# EAGLE board UGS+PSU (EAGLE 6.3)
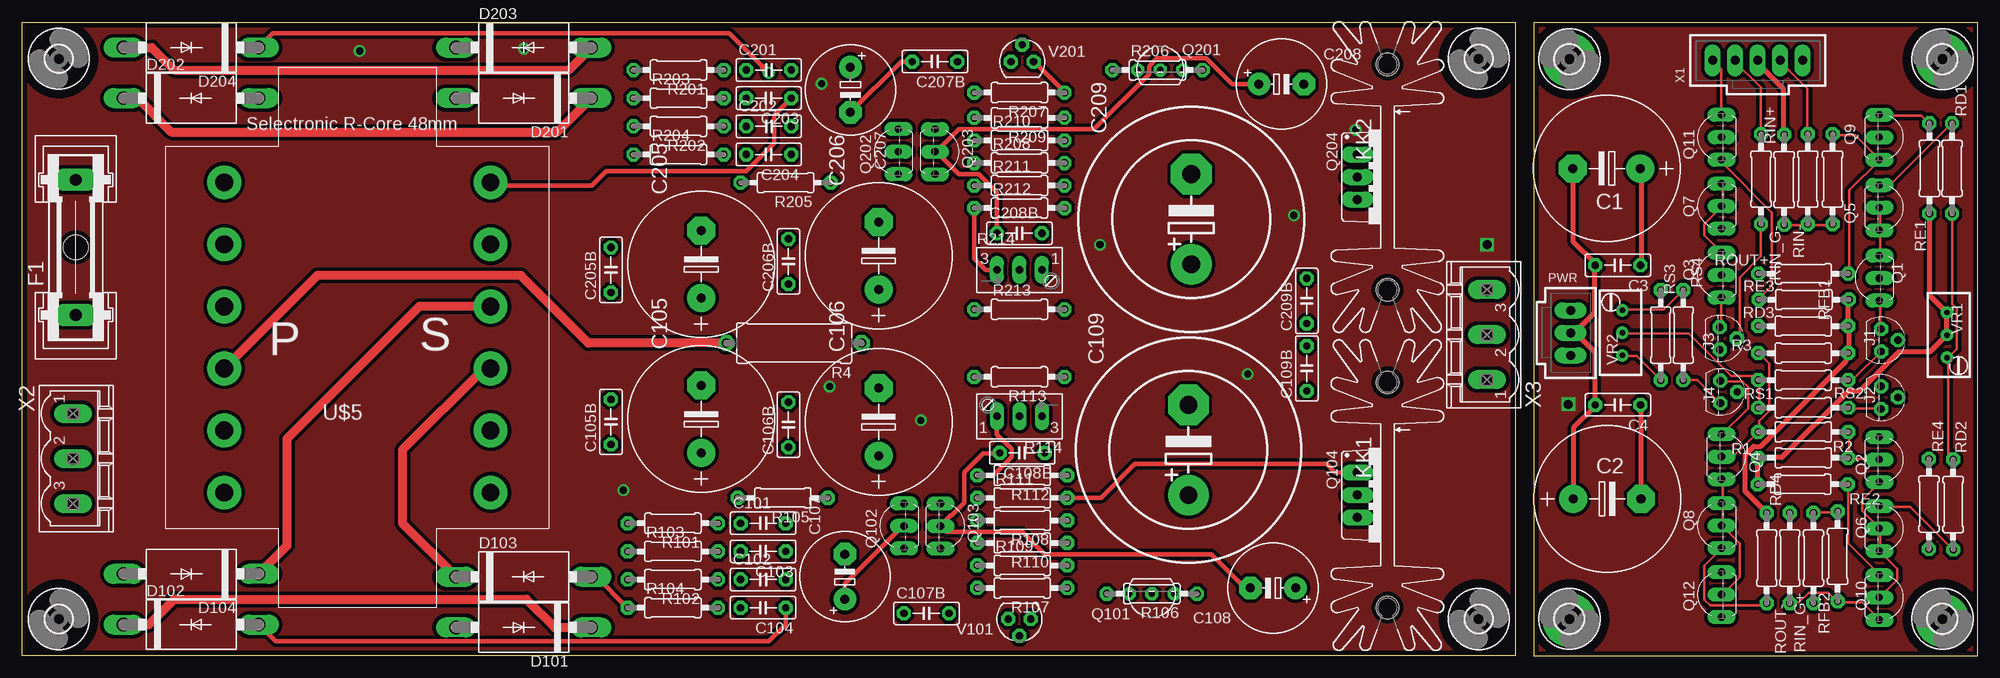
[diagram p0: board, top side]
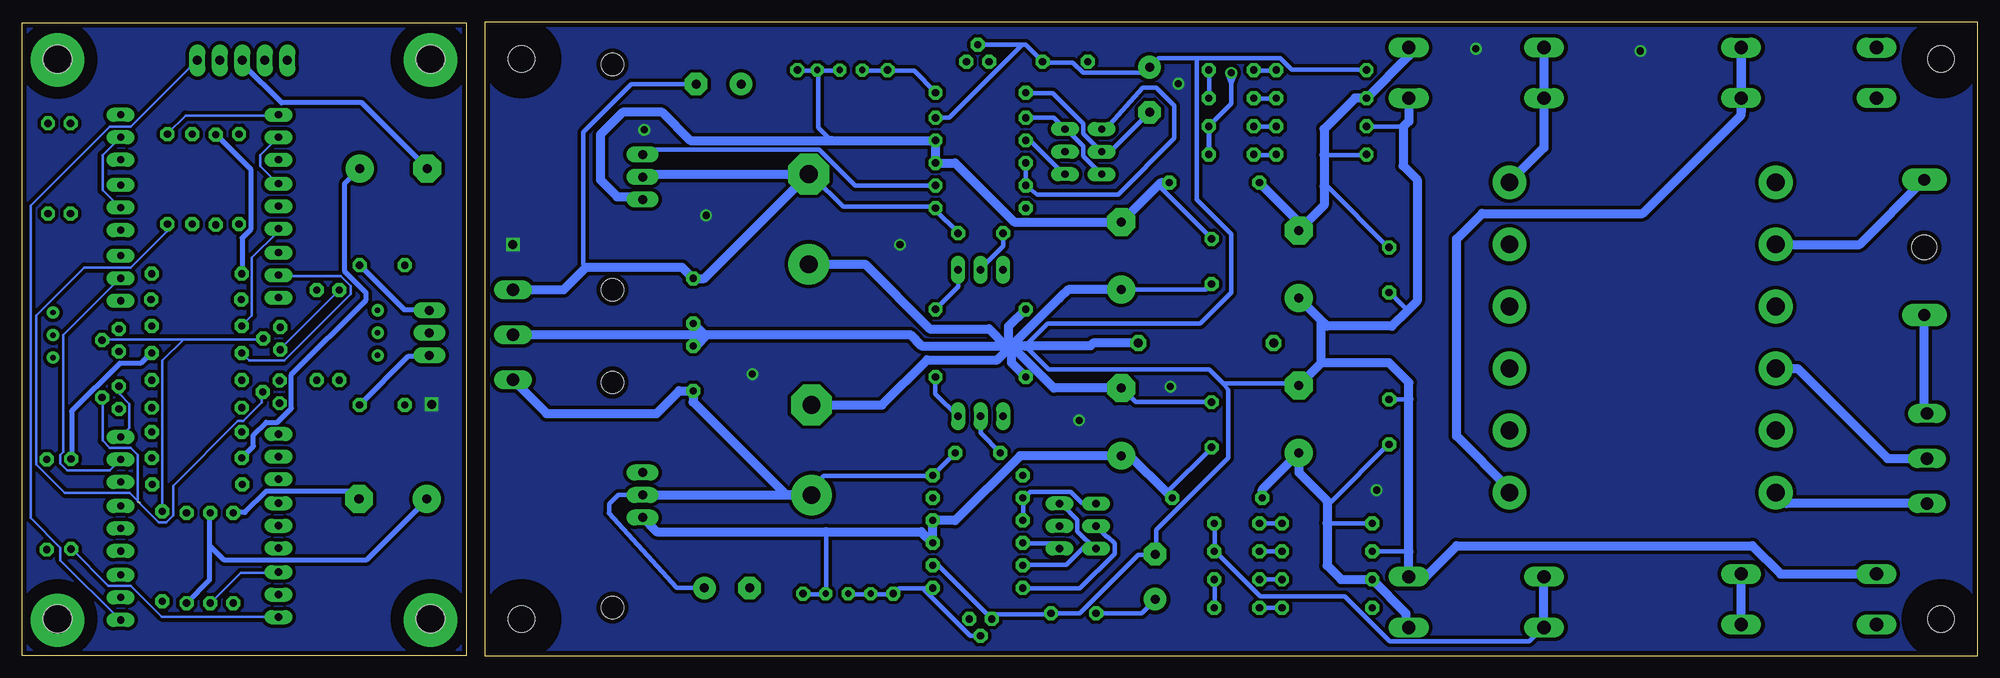
[diagram p1: board, bottom side, seen from below]

Size 220.41 x 71.47 mm. Coordinates in mm from the lower left corner, seen from the top.
Outline: 170.38,71.42 170.38,0 220.41,0 220.41,71.42 170.38,71.42
Outline: 168.28,0.03 0,0.03 0,71.47 168.28,71.47 168.28,0.03
Copper layers (1*16): Top 0.035mm / dielectric 1.5mm / Bottom 0.035mm
Design rules "gael design rules": minimum track width 0.2mm, minimum drill 0.4mm, track to track 8mil, track to pad 8mil, pad to pad 8mil, via to via 8mil, smd to smd 8mil, copper to edge 20mil, drill to drill 8mil, minimum pad ring 15mil, minimum via ring 10mil, stop-mask expansion 4mil, vias tented up to drill 0mil, thermal gap 10mil
Net classes: 0 default: width 0.203 mm, clearance 0.203 mm; 1 Mains: width 1.016 mm, clearance 2.5 mm; 2 power: width 0.508 mm, clearance 0.203 mm

## Footprints (pad centres in the part's own frame; a part is rotated, then mirrored left to right if it is on the bottom)
E7,5-16 = drill 1.016 pad 3.15: + -3.81,0 | drill 1.016 pad 3.15 octagon: - 3.81,0
C050-025X075 = drill 0.813 octagon: 1 -2.54,0; 2 2.54,0
E5-10,5 = drill 1.016 pad 2.54: + -2.54,0 | drill 1.016 pad 2.54 octagon: - 2.54,0
EB25D = drill 2.007 pad 4.597: + -5.08,0 | drill 2.007 pad 4.597 octagon: - 5.08,0
DO201-15 = drill 1.499 long: A 7.62,0; C -7.62,0
UGS = drill 3 pad 6: P$1 23.165,-12.497; P$2 23.19,29.54; P$3 -40.005,29.54; P$4 -40.005,-12.497
GSH15 = drill 1.321 pad 2.54 long: 1 -7.62,0; 2 7.62,0 | hole 2.794: 0,0
3,0 = hole 3: 0,0
TO92 = drill 0.813 octagon: 1 1.27,0; 2 0,1.905; 3 -1.27,0
SK104 = hole 2.54: -12.7,-0.762; 12.7,-0.762
70543-03 = drill 1.016 long: 1 -2.54,0; 2 0,0; 3 2.54,0
TO92-EBC = drill 0.813 long: B 0,-1.27; C 2.54,-1.27; E -2.54,-1.27
TO-92 = drill 0.7 octagon: 1 -2.54,0; 2 0,0; 3 2.54,0
TO220BV = drill 1.016 long: D 0,-2.54; G -2.54,-2.54; S 2.54,-2.54
0207/10 = drill 0.813 octagon: 1 -5.08,0; 2 5.08,0
P0613/15 = drill 1.016 octagon: 1 -7.62,0; 2 7.62,0
S64W = drill 0.813 long: A 2.54,1.27; E -2.54,1.27; S 0,1.27
3,2 = hole 3.2: 0,0
R-CORE48MM = drill 2 pad 3.81: P1 -15,-17.5; P2 -15,-10.5; P3 -15,-3.5; P4 -15,3.5; P5 -15,10.5; P6 -15,17.5; P7 15,17.5; P8 15,10.5; P9 15,3.5; P10 15,-3.5; P11 15,-10.5; P12 15,-17.5
SOT54E = drill 0.813 octagon: A1 -1.27,0; A2 1.27,0; C 0,1.905
RTRIMT93YA = drill 0.61: 1 0,-2.54; 2 0,0; 3 0,2.54
70543-05 = drill 1.016 long: 1 -5.08,0; 2 -2.54,0; 3 0,0; 4 2.54,0; 5 5.08,0
MSTBV3 = drill 1.397 long: 1 -5.08,0; 2 0,0; 3 5.08,0

## Placement (x,y rotation side)
C1  470µ  [E7,5-16]  178.57,54.97 180 top
C2  470µ  [E7,5-16]  178.64,17.7 0 top
C3  100nF  [C050-025X075]  179.84,44.05 180 top
C4  100nF  [C050-025X075]  179.84,28.3 180 top
C101  100n  [C050-025X075]  83.5,14.95 0 top
C102  100n  [C050-025X075]  83.5,8.6 0 top
C103  100n  [C050-025X075]  83.5,11.78 180 top
C104  100n  [C050-025X075]  83.5,5.43 180 top
C105  2200µ  [E7,5-16]  76.52,26.7 90 top
C105B  100n  [C050-025X075]  66.36,26.38 90 top
C106  1000µ  [E7,5-16]  96.52,26.38 90 top
C106B  100n  [C050-025X075]  86.36,26.07 90 top
C107  100µ  [E5-10,5]  92.71,8.92 90 top
C107B  100n  [C050-025X075]  101.92,4.79 0 top
C108  100µ  [E5-10,5]  140.97,7.65 180 top
C108B  100n  [C050-025X075]  112.71,22.89 180 top
C109  4700µ  [EB25D]  131.44,23.21 90 top
C109B  100n  [C050-025X075]  144.78,32.42 90 top
C201  100n  [C050-025X075]  84.14,66.07 0 top
C202  100n  [C050-025X075]  84.14,59.72 0 top
C203  100n  [C050-025X075]  84.14,62.9 180 top
C204  100n  [C050-025X075]  84.14,56.55 180 top
C205  2200µ  [E7,5-16]  76.52,44.16 90 top
C205B  100n  [C050-025X075]  66.36,43.53 90 top
C206  1000µ  [E7,5-16]  96.52,45.12 90 top
C206B  100n  [C050-025X075]  86.36,44.48 90 top
C207  100µ  [E5-10,5]  93.34,63.85 270 top
C207B  100n  [C050-025X075]  102.87,67.02 180 top
C208  100µ  [E5-10,5]  141.92,64.48 0 top
C208B  100n  [C050-025X075]  112.4,47.66 0 top
C209  4700µ  [EB25D]  131.76,49.24 90 top
C209B  100n  [C050-025X075]  144.78,40.04 90 top
D101  MUR220  [DO201-15]  56.52,3.21 180 top
D102  MUR220  [DO201-15]  19.05,3.52 0 top
D103  MUR220  [DO201-15]  56.52,8.92 0 top
D104  MUR220  [DO201-15]  19.05,9.24 180 top
D201  MUR220  [DO201-15]  56.52,62.9 180 top
D202  MUR220  [DO201-15]  19.05,62.9 0 top
D203  MUR220  [DO201-15]  56.52,68.61 0 top
D204  MUR220  [DO201-15]  19.05,68.61 180 top
E$1  [UGS]  186.88,27.2 270 top
F1  100mA  [GSH15]  6.03,46.07 90 top
H1  MOUNT-HOLE3.0  [3,0]  164.15,67.34 180 top
H2  MOUNT-HOLE3.0  [3,0]  4.13,4.16 180 top
H3  MOUNT-HOLE3.0  [3,0]  4.13,67.34 180 top
H4  MOUNT-HOLE3.0  [3,0]  164.15,4.16 180 top
J1  2SK170 J1  [TO92]  209.5,35.6 270 top
J2  2SK170 J2  [TO92]  209.5,29.13 270 top
J3  2SJ74 J3  [TO92]  191.34,35.79 270 top
J4  2SJ74 J4  [TO92]  191.4,29.76 270 top
KK1  SK104  [SK104]  154.62,18.13 270 top
KK2  SK104  [SK104]  154.62,54.01 270 top
PWR  PWR  [70543-03]  174.51,36.43 270 top
Q1  ZTX450  [TO92-EBC]  208.04,42.59 90 top
Q2  ZTX450  [TO92-EBC]  210.58,22.14 270 top
Q3  ZTX550  [TO92-EBC]  190.26,42.94 90 top
Q4  ZTX550  [TO92-EBC]  192.8,22.46 270 top
Q5  ZTX550  [TO92-EBC]  210.58,50.56 270 top
Q6  ZTX550  [TO92-EBC]  210.58,14.36 270 top
Q7  ZTX450  [TO92-EBC]  190.26,50.72 90 top
Q8  ZTX450  [TO92-EBC]  190.26,14.68 90 top
Q9  ZTX550  [TO92-EBC]  210.58,58.5 270 top
Q10  ZTX550  [TO92-EBC]  210.58,6.58 270 top
Q11  ZTX450  [TO92-EBC]  190.26,58.5 90 top
Q12  ZTX450  [TO92-EBC]  190.26,6.9 90 top
Q101  J113  [TO-92]  127.32,7.02 180 top
Q102  MPSA42  [TO92-EBC]  98.11,14.64 90 top
Q103  MPSA42  [TO92-EBC]  104.78,14.64 270 top
Q104  IRF9610  [TO220BV]  153.03,18.13 270 top
Q201  J113  [TO-92]  128.27,66.07 0 top
Q202  MPSA92  [TO92-EBC]  97.47,56.86 90 top
Q203  MPSA92  [TO92-EBC]  104.14,56.86 270 top
Q204  IRF610  [TO220BV]  153.03,54.01 270 top
R1  10k  [0207/10]  200.74,22.33 180 top
R2  15k  [0207/10]  200.74,25.25 0 top
R3  10k  [0207/10]  200.74,34.14 0 top
R4  10R/1W  [P0613/15]  87,35.27 180 top
R101  1.2R  [0207/10]  73.34,14.95 180 top
R102  1.2R  [0207/10]  73.34,8.6 180 top
R103  1.2R  [0207/10]  73.34,11.78 0 top
R104  1.2R  [0207/10]  73.34,5.43 0 top
R105  4.7R  [0207/10]  85.72,17.81 180 top
R106  10k  [0207/10]  127.32,7.02 180 top
R107  1k  [0207/10]  112.71,7.65 180 top
R108  10k  [0207/10]  112.71,15.27 180 top
R109  4,7K  [0207/10]  112.71,10.19 0 top
R110  10k  [0207/10]  112.71,12.73 180 top
R111  220R  [0207/10]  112.71,17.81 0 top
R112  22k  [0207/10]  112.71,20.35 180 top
R113  5,6k  [0207/10]  112.4,31.46 180 top
R114  1k  [S64W]  112.4,28.29 180 top
R201  1.2R  [0207/10]  73.98,66.07 180 top
R202  1.2R  [0207/10]  73.98,59.72 180 top
R203  1.2R  [0207/10]  73.98,62.9 0 top
R204  1.2R  [0207/10]  73.98,56.55 0 top
R205  4.7R  [0207/10]  86.04,53.37 180 top
R206  10k  [0207/10]  127.95,66.07 0 top
R207  1k  [0207/10]  112.4,63.53 180 top
R208  10k  [0207/10]  112.4,55.59 0 top
R209  4,7K  [0207/10]  112.4,60.67 180 top
R210  10k  [0207/10]  112.4,58.13 0 top
R211  220R  [0207/10]  112.4,53.05 0 top
R212  22k  [0207/10]  112.4,50.51 0 top
R213  5,6k  [0207/10]  112.4,39.08 0 top
R214  1k  [S64W]  112.4,42.26 0 top
RD1  1k47  [0207/10]  217.5,54.97 90 top
RD2  1k47  [0207/10]  217.63,17.06 270 top
RD3  1k5  [0207/10]  200.74,37.19 0 top
RD4  1k5  [0207/10]  196.61,11.03 90 top
RE1  750R  [0207/10]  214.96,54.97 270 top
RE2  750R  [0207/10]  200.67,19.35 0 top
RE3  750R  [0207/10]  200.8,40.18 0 top
RE4  750R  [0207/10]  214.9,17.12 90 top
RFB1  56k  [0207/10]  204.04,53.76 90 top
RFB2  56k  [0207/10]  204.61,11.22 90 top
RIN+  15k  [0207/10]  195.97,53.76 90 top
RIN-  15k  [0207/10]  201.24,53.76 270 top
RIN_G+  47k  [0207/10]  201.88,11.03 90 top
RIN_G-  47k  [0207/10]  198.58,53.7 270 top
ROUT+  1k  [0207/10]  200.74,43.1 0 top
ROUT-  1k  [0207/10]  199.21,11.03 270 top
RS1  47R rs1  [0207/10]  200.74,31.1 180 top
RS2  47R rs2  [0207/10]  200.74,27.98 180 top
RS3  22R rs3  [0207/10]  184.67,36.18 90 top
RS4  22R rs4  [0207/10]  187.21,36.18 270 top
U$1  [3,2]  216.42,67.29 270 top
U$2  [3,2]  216.42,4.17 270 top
U$3  [3,2]  174.38,4.17 270 top
U$4  [3,2]  174.38,67.29 270 top
U$5  R-CORE-SELECTRONIC-PCB  [R-CORE48MM]  37.78,35.91 0 top
V101  LM336-5  [SOT54E]  112.4,4.16 180 top
V201  LM336-5  [SOT54E]  112.71,67.02 0 top
VR1  20R  [RTRIMT93YA]  216.93,36.18 180 top
VR2  50R  [RTRIMT93YA]  180.35,36.43 0 top
X1  C-GRID-05-70543  [70543-05]  195.59,67.16 0 top
X2  220V  [MSTBV3]  5.72,22.26 270 top
X3  MSTBV3  [MSTBV3]  165.1,36.23 90 top

## Library data of the parts
C1-C4 C101-C105 C105B C106 C106B C107 C107B C108 C108B C109 C109B C201-C205 C205B C206 C206B C207 C207B C208 C208B C209 C209B R1-R4 R101-R113 R201-R213 RD1-RD4 RE1-RE4 RFB1 RFB2 RIN+ RIN- RIN_G+ RIN_G- ROUT+ ROUT- RS1-RS4 VR1 VR2 = rcl
D101-D104 D201-D204 V101 V201 = diode
E$1 U$5 = gael
F1 = fuse; MPN: 64900001039; OC_FARNELL: 1271673; OC_NEWARK: 02P0318
H1-H4 U$1-U$4 = holes
J1-J4 = transistor-fet
KK1 KK2 = heatsink
PWR X1 = con-molex; OC_FARNELL: unknown; OC_NEWARK: unknown
Q1-Q12 Q102 Q103 Q202 Q203 = transistor
Q101 Q201 = 00_steve
Q104 Q204 = transistor-power
R114 R214 = pot
X2 X3 = con-phoenix-508; MPN: MSTBV 2,5/3-GF-5.08; OC_FARNELL: 1792793; OC_NEWARK: 69R9846

## Nets
+24V [power]: C1.+ C3.1 PWR.1 R1.2 RE1.2 RE2.1 VR1.1 VR1.2
-24V [power]: C2.- C4.1 PWR.3 R3.2 RD3.2 RD4.2 RE3.2 RE4.2
GND [power]: C1.- C2.+ C3.2 C4.2 PWR.2 RIN_G+.1 RIN_G-.1 ROUT+.1 ROUT-.1 X1.3
GND1 [power]: C105.- C105B.2 C106.- C106B.2 C107.- C107B.2 C109.- C109B.2 C205.+ C205B.1 C206.+ C206B.1 C207.+ C207B.1 C209.+ C209B.1 D103.A D104.A D201.C D202.C R4.1 R103.1 R104.1 R109.2 R113.2 R201.2 R202.2 R209.1 R213.1 V101.A2 V201.C X3.2
IN+: RIN+.2 X1.2
IN-: RIN-.1 X1.4
N$1: J3.3 Q3.E
N$2: RD1.1 RD2.1 VR1.3
N$3: Q1.B Q2.B R1.1 R2.2
N$4: Q3.B Q4.B R2.1 R3.1
N$5: J4.3 Q4.E
N$6: J4.1 RS4.2
N$7: J3.1 RS3.2
N$8: Q10.E RE2.2
N$9 [power]: C101.2 C103.1 D101.A D103.C U$5.P10
N$10 [power]: C102.2 C104.1 D102.A D104.C U$5.P9
N$11 [power]: C105.+ C105B.1 D101.C D102.C R101.2 R102.2 R105.2
N$12 [power]: C201.2 C203.1 D201.A D203.C U$5.P7
N$13: J2.2 J4.2 RFB1.1 RIN-.2 RIN_G-.2
N$14: RS1.2 RS2.2 VR2.2
N$15: J2.1 RS2.1
N$16 [power]: C202.2 C204.1 D202.A D204.C U$5.P12
N$17 [power]: C205.- C205B.2 D203.A D204.A R203.1 R204.1 R205.2
N$18: Q5.E RD1.2
N$19 [power]: C106.+ C106B.1 Q101.1 Q104.S R105.1 R106.1 R108.1 R110.1
N$20: J1.1 RS1.1
N$21: RS3.1 VR2.1
N$22: RS4.1 VR2.3
N$23: J1.2 J3.2 RFB2.2 RIN+.1 RIN_G+.2
N$24 [power]: C206.- C206B.2 Q201.2 Q201.3 Q204.S R205.1 R206.2 R208.2 R210.2
N$25: Q6.E RD2.2
N$26: Q11.E RE3.1
N$27: Q9.E RE1.1
N$28: Q201.1 R206.1 R207.1 V201.A2
N$29: C107.+ C107B.1 Q102.B R107.2
N$30: Q8.E RD4.1
N$31: Q4.C Q8.B Q8.C Q12.B
N$32: Q7.E RD3.1
N$33: C207.- C207B.2 Q202.B R207.2
N$34: Q12.E RE4.1
N$35: Q2.C Q6.B Q6.C Q10.B
N$36 [power]: C108.+ C108B.1 C109.+ C109B.1 Q104.D R112.1 X3.1
N$37 [power]: C208.- C208B.2 C209.- C209B.2 Q204.D R212.2 X3.3
N$38: Q3.C Q7.B Q7.C Q11.B
N$39: J1.3 Q1.E
N$40: J2.3 Q2.E
N$41: Q1.C Q5.B Q5.C Q9.B
N$42: Q102.C R108.2 R111.1
N$43: Q202.C R208.1 R211.1
N$44: Q103.C R110.2
N$45: Q102.E Q103.E R109.1
N$46: Q202.E Q203.E R209.2
N$47: Q203.C R210.1
N$48: Q101.2 Q101.3 R106.2 R107.1 V101.C
N$49: Q104.G R111.2
N$50: Q204.G R211.2
N$51: C108.- C108B.2 Q103.B R114.S
N$52: C208.+ C208B.1 Q203.B R214.S
N$53: R112.2 R114.A
N$54: R113.1 R114.E
N$55: R212.1 R214.E
N$56: R213.2 R214.A
N$57: C102.1 R102.1
N$58: C103.2 R103.2
N$59: C104.2 R104.2
N$60: C201.1 R201.1
N$61: C202.1 R202.1
N$62: C203.2 R203.2
N$63: C204.2 R204.2
N$64: C101.1 R101.1
N$65 [power]: R4.2 U$5.P3 X2.2
N$66 [Mains]: U$5.P1 X2.3
N$67 [Mains]: F1.1 X2.1
N$68 [Mains]: F1.2 U$5.P5
OUT+: Q9.C Q11.C RFB1.2 ROUT+.2 X1.1
OUT-: Q10.C Q12.C RFB2.1 ROUT-.2 X1.5

## Tracks (layer width: path | path; a pad name or v marks a point on that pad's centre or on a via)
+24V
  Top 0.559: C3.1 182.45,44.11 182.45,54.91 C1.+ | RE2.1 195.62,19.35 195.62,22.21 R1.2 195.94,22.36 198.32,22.36 205.78,29.83 207.05,29.83 211.5,34.27 214.99,34.27 216.74,36.02 VR1.2 216.9,36.18 216.9,38.72 VR1.1 216.74,38.87 214.99,40.62 214.99,49.83 RE1.2
  Bottom 0.559: C3.1 177.37,39.03 174.51,39.03 PWR.1 | R1.2 194.35,23.63 194.35,24.9 192.93,26.33 191.66,26.33 190.07,27.92 190.07,31.73 181.65,40.14 181.65,40.94 184.04,43.32 184.04,53.32 C1.+
-24V
  Top 0.559: RE3.2 205.78,40.14 205.78,37.45 RD3.2 205.94,37.13 205.94,34.27 R3.2 205.63,33.95 205.63,33.32 195.94,23.63 195.15,23.63 194.2,22.68 194.2,18.55 196.58,16.17 RD4.2 | C2.- 182.45,28.24 C4.1
  Bottom 0.559: RE4.2 214.83,22.21 214.83,27.6 209.44,33 207.05,33 205.94,34.11 R3.2 | RD4.2 196.58,16.17 195.31,16.17 192.93,18.55 183.24,18.55 182.45,17.76 C2.- | C4.1 176.89,33.79 174.51,33.79 PWR.3
GND
  Top 0.559: RIN_G-.1 198.48,58.88 198.48,63.96 195.62,66.81 195.62,67.13 X1.3 | C1.- 174.83,54.91 174.83,46.65 177.21,44.27 C3.2 177.21,43.95 177.21,38.72 174.99,36.49 174.51,36.49 PWR.2 175.15,36.33 177.21,34.27 177.21,28.4 C4.2 177.21,28.08 174.83,25.7 C2.+
  Bottom 0.559: ROUT+.1 195.62,43.16 195.62,47.13 194.67,48.08 194.67,54.91 198.48,58.72 RIN_G-.1 | 199.28,12.43 199.28,8.55 RIN_G+.1 | 199.28,12.43 199.28,16.01 ROUT-.1 | C2.+ 174.83,17.6 181.65,10.78 197.62,10.78 199.28,12.43 | X1.3 195.47,67.13 195.47,66.66 191.18,62.37 182.13,62.37 174.83,55.07 C1.-
GND1
  Top 0.508: R104.1 68.2,5.43 64.52,9.11 D103.A
  Top 1.016: D103.A 63.18,8.92 | D201.C 60.32,59.09 16.83,59.09 13.08,62.83 11.43,62.83 D202.C
  Bottom 0.508: 88.01,67.4 92.33,67.4 C207.+ | 88.01,67.4 78.61,67.4 77.34,66.13 68.96,66.13 R201.2 | C207.+ 93.98,65.75 | 64.77,59.66 68.83,59.66 R202.2 | 64.26,38.96 66.29,40.99 C205B.1 | 64.14,28.92 C105B.2 | 64.14,11.78 R103.1 | 88.01,67.4 88.01,51.47 84.14,47.59 84.14,40.99 87.63,37.5 104.84,37.5 107.37,34.94 104.71,32.29 86.61,32.29 85.12,30.8 | 107.82,68.93 107.31,68.93 C207B.1 105.28,66.9 101.98,66.9 100.84,65.75 94.11,65.75 C207.+ | 107.82,68.93 V201.C | R209.1 115.95,60.67 107.82,68.8 107.82,68.93 | R109.2 117.73,10.13 117.09,10.13 V101.A2 111.38,4.67 104.65,4.67 C107B.2 101.22,4.79 94.62,11.4 92.71,11.4 C107.- 92.58,11.65 92.58,14.19 84.46,22.32 84.46,30 85.12,30.8 | 96.2,30.51 C106.- 94.93,28.61 C106B.2 | C206.+ 87,41.31 C206B.1 | 11.43,62.83 D202.C | C105.- 76.96,30.7 84.96,30.7 85.12,30.8
  Bottom 1.016: 143.51,36.23 143.19,36.23 | 143.19,36.23 120.33,36.23 119.06,34.96 109.54,34.96 | C106.- 104.14,30.19 108.9,34.96 | C206.+ 102.49,41.31 103.5,40.35 108.59,35.27 | C109B.2 144.46,34.96 143.19,36.23 | C209B.1 143.51,36.23 | C109.- 123.51,28.29 118.43,33.37 110.49,33.37 109.54,34.32 109.54,34.96 | C209.+ 125.41,44.16 118.11,36.86 111.44,36.86 109.54,34.96 | 73.98,33.05 66.36,33.05 64.14,30.83 64.14,28.92 64.14,11.78 D103.A 62.23,8.92 58.74,12.41 25.4,12.41 22.23,9.24 D104.A | 73.98,37.81 73.34,37.18 66.04,37.18 64.26,38.96 63.18,40.04 63.18,53.69 64.77,55.28 64.77,59.66 64.14,60.29 D201.C | 73.98,37.81 C205.+ | X3.2 143.51,36.23 | 73.98,33.05 73.98,37.81 | C105.- 73.98,33.05 | 109.54,34.96 109.22,34.96 | R113.2 108.9,33.05 108.9,34.64 109.06,34.8 | 109.06,34.8 109.22,34.96 | 109.22,34.96 109.22,35.27 | 109.22,35.27 109.22,37.18 R213.1 | 108.59,35.27 108.9,34.96 | 108.9,34.96 109.06,34.8 | 108.27,34.96 107.37,34.94 100.01,34.96 99.69,35.27 R4.1 | 108.27,34.96 108.59,35.27 | 108.27,34.96 108.9,34.96 | 108.9,34.96 109.22,35.27
GND2  (via drill 0.8, 1)
  other vias: 165.1,46.39 121.48,46.37 143.32,49.68 138.11,31.77 101.28,26.56 67.75,18.69 38.04,68.22 56.58,68.47 91,30.37 90.11,64.53 150.3,59.33
  pour Bottom (isolate 0.406): 167.96,0.35 0.32,0.35 0.32,71.15 167.96,71.15
  pour Top (isolate 0.406): 167.96,0.35 0.32,0.35 0.32,71.15 167.96,71.15
IN+
  Top 0.305: RIN+.2 195.94,58.88 195.94,64.12 192.93,67.13 X1.2
IN-
  Top 0.305: RIN-.1 201.18,58.88 201.18,63.96 198.01,67.13 X1.4
N$1
  Top 0.305: Q3.E 191.5,40.3 191.5,37.29 191.34,37.13 J3.3
N$2
  Top 0.305: 217.06,33.64 217.06,22.68 217.53,22.21 RD2.1 | 217.06,33.64 218.01,34.59 218.01,39.19 217.53,39.67 217.53,49.83 RD1.1 | 217.06,33.64 VR1.3
N$3
  Top 0.305: R2.2 205.94,25.22 205.94,22.36 R1.1 205.94,22.21 209.28,22.21 Q2.B
  Bottom 0.305: Q1.B 209.44,42.53 215.79,36.18 215.79,23 216.1,22.68 216.1,21.73 215.31,20.94 210.55,20.94 209.44,22.05 Q2.B
N$4
  Top 0.305: Q4.B 191.66,22.52 192.93,22.52 R2.1 195.78,25.38 195.78,26.49 196.89,27.6 196.89,33 195.78,34.11 R3.1
  Bottom 0.305: R3.1 194.83,33.32 190.86,33.32 183.4,40.78 183.4,41.73 184.51,42.84 191.5,42.84 Q3.B
N$5
  Top 0.305: J4.3 191.5,30.94 193.88,30.94 194.51,30.3 194.51,27.92 191.66,25.06 Q4.E
N$6
  Top 0.305: RS4.2 188.8,31.1 J4.1
N$7
  Bottom 0.305: RS3.2 191.34,34.59 J3.1
N$8
  Top 0.305: RE2.2 205.78,19.35 205.78,12.68 209.28,9.19 Q10.E
N$9
  Top 1.016: U$5.P10 52.06,32.41 42.86,23.21 42.86,14.95 D103.C
  Bottom 0.508: C101.2 85.98,14.95 85.98,11.78 C103.1 85.85,11.65 80.9,6.7 71.37,6.7 66.29,1.62 50.55,1.62 49.28,2.89 D101.A
  Bottom 1.016: D101.A D103.C
N$10
  Top 0.508: C104.1 86.04,3.52 84.14,1.62 28.57,1.62 D102.A
  Top 1.016: U$5.P9 44.78,39.41 29.84,24.48 29.84,12.41 D104.C
  Bottom 0.508: 85.98,5.49 85.98,5.43 C104.1 85.98,5.49 | C102.2 85.98,8.6 85.98,5.49
  Bottom 1.016: D102.A D104.C
N$11
  Top 1.016: D102.C 14.29,3.52 17.15,6.38 56.83,6.38 60.01,3.21 D101.C
  Bottom 0.508: C105B.1 66.42,23.84 72.9,17.37 73.34,17.37 | 73.34,14.95 R101.2
  Bottom 1.016: R105.2 80.65,18.76 C105.+ 76.52,20.67 73.34,17.49 73.34,17.37 73.34,14.95 73.34,10.19 71.76,8.6 R102.2 64.45,4.79 64.45,3.52 D101.C 62.55,3.21
N$12
  Top 0.508: C203.1 84.77,60.99 84.77,57.82 81.6,54.64 65.85,54.64 64.2,53.05 53.02,53.05 U$5.P7
  Bottom 0.508: C201.2 86.61,66.01 86.61,62.96 C203.1
  Bottom 1.016: D203.C D201.A 48.9,57.3 U$5.P7
N$13  (1 unrouted)
  Top 0.305: RIN_G-.2 198.64,48.56 201.18,48.56 RIN-.2 201.34,48.56 204.04,48.56 RFB1.1
  Bottom 0.305: J4.2 193.4,29.67 193.4,28.56 195.47,26.49 196.1,26.49 203.4,19.19 203.4,15.86 204.2,15.06 204.99,15.06 207.37,17.44 207.37,22.68 208.17,23.48 210.55,23.48 211.34,24.27 211.34,29.03 J2.2 | RFB1.1 204.04,47.92 208.17,43.8 213.4,43.8 218.8,38.4 218.8,21.57 215.63,18.4 208.29,18.4 207.15,17.25
N$14
  Top 0.305: VR2.2 180.38,36.33 187.85,36.33 192.61,31.57 195.15,31.57 195.62,31.1 RS1.2 195.78,31.1 195.78,28.08 RS2.2
N$15
  Top 0.305: RS2.1 205.94,27.92 209.44,27.92 J2.1
N$16  (via drill 0.8)
  Top 0.508: D204.C 28.26,70.2 79.69,70.2 83.29,66.6 | v84.14,65.75 83.29,66.6 | 83.29,66.6 83.78,65.58 v84.14,65.75 | 83.29,66.6 84.31,66.11 v84.14,65.75
  Bottom 0.508: C202.2 86.61,59.66 86.61,56.61 C204.1 | C204.1 C202.2 | 86.61,56.36 C204.1 | 37.78,49.88 26.35,61.31 26.35,68.61 | 84.14,64.55 84.14,62.26 C202.2 | 84.14,64.55 v84.14,65.75 | 84.14,64.55 84.51,65.62 v84.14,65.75 | 84.14,64.55 83.76,65.62 v84.14,65.75
  Bottom 1.016: D204.C D202.A 26.67,60.99 37.78,49.88 55.88,49.88 58.74,47.02 58.74,24.8 52.78,18.84 U$5.P12
N$17
  Top 1.016: D204.A 14.61,68.61 17.15,66.07 61.59,66.07 D203.A
  Bottom 0.508: 73.66,56.48 68.96,56.48 R204.1 | C205B.2 66.42,46.07 73.28,52.93 73.66,52.93
  Bottom 1.016: R205.2 76.52,48.93 C205.- 73.66,50.83 73.66,52.93 73.66,56.48 73.66,59.4 70.17,62.9 R203.1 64.14,67.66 D203.A
N$18
  Top 0.305: Q5.E 209.44,53.16 210.55,53.16 217.37,59.99 RD1.2
N$19
  Bottom 0.508: 91.41,18.41 86.36,23.46 C106B.1 | R106.1 132.33,6.95 129.92,6.95 Q101.1 129.79,7.21 129.79,14
  Bottom 1.016: R105.1 91.41,18.41 95.57,22.57 C106.+ 107.95,22.57 115.25,15.27 R108.1 R110.1 119.06,14 129.79,14 148.91,14 Q104.S
N$20
  Top 0.305: RS1.1 206.26,31.1 J1.1
N$21
  Top 0.305: RS3.1 181.97,33.79 180.38,33.79 VR2.1
N$22
  Top 0.305: RS4.1 184.99,39.03 180.38,39.03 VR2.3
N$23
  Top 0.305: RIN_G+.2 201.97,16.17 204.51,16.17 RFB2.2 | RIN+.1 195.94,48.56 195.94,45.07 193.56,42.68 193.56,36.18 193.24,35.86 J3.2
  Bottom 0.305: 202.2,35.7 193.24,35.7 J3.2 | 202.2,35.7 211.31,35.7 J1.2 | 204.51,16.33 RFB2.2 204.61,33.29 202.2,35.7
N$24
  Bottom 0.508: 92.36,53.09 86.36,47.08 C206B.2 | Q201.3 130.81,66.01 132.97,66.01 R206.2 | Q201.2 128.27,66.01 130.68,66.01 Q201.3 | Q201.3 130.68,65.75 130.68,59.59 129.22,58.13
  Bottom 1.016: R205.1 92.08,53.37 92.36,53.09 C206.- 108.59,48.93 115.25,55.59 R208.2 R210.2 129.22,58.13 145.1,58.13 148.27,61.31 152.72,61.31 155.26,58.77 155.26,53.69 153.35,51.78 150.81,51.78 Q204.S
N$25
  Top 0.305: Q6.E 209.44,16.81 212.77,16.81 217.53,12.05 RD2.2
N$26
  Top 0.305: Q11.E 191.66,55.86 191.66,55.54 197.21,49.99 197.21,41.73 195.78,40.3 RE3.1
N$27
  Top 0.305: Q9.E 209.44,60.94 214.04,60.94 214.83,60.15 RE1.1
N$28
  Top 0.508: V201.A2 114.05,67.02 117.47,63.59 R207.1
  Bottom 0.508: Q201.1 125.73,66.01 122.94,66.01 R206.1 122.68,66.01 119.89,66.01 117.47,63.59 R207.1
N$29
  Top 0.508: C107.+ 92.71,8.1 99.31,14.7 Q102.B
  Bottom 0.508: C107B.1 94.23,4.79 92.71,6.32 C107.+ | Q102.B 98.17,13.43 98.04,13.43 97.28,12.67 97.28,11.52 101.22,7.59 107.57,7.59 R107.2
N$30
  Top 0.305: Q8.E 191.5,12.05 189.59,10.14 189.59,6.33 190.23,5.7 196.42,5.7 196.58,5.85 RD4.1
N$31
  Top 0.305: Q4.C 191.66,19.82 191.66,17.28 Q8.C 191.66,17.13 191.66,14.74 Q8.B 191.66,14.59 193.56,12.68 193.56,8.87 191.66,6.97 Q12.B
N$32
  Bottom 0.305: Q7.E 191.66,48.08 191.66,47.76 194.51,44.91 194.51,38.4 195.62,37.29 RD3.1
N$33
  Top 0.508: C207.- 99.06,67.02 C207B.2
  Bottom 0.508: 98.81,56.86 Q202.B | C207.- 97.66,56.99 98.55,56.99 Q202.B | Q202.B 98.93,56.99 100.84,58.9 100.84,60.04 104.27,63.47 107.31,63.47 R207.2
N$34
  Bottom 0.305: Q12.E 191.66,4.43 204.67,4.43 208.17,7.92 210.71,7.92 214.83,12.05 RE4.1
N$35
  Top 0.305: Q2.C 209.28,19.51 207.37,17.6 207.37,16.33 209.28,14.43 Q6.B 209.44,14.27 209.44,11.89 Q6.C 209.44,11.73 211.34,9.82 211.34,8.55 209.44,6.65 Q10.B
N$36
  Bottom 0.508: C108B.1 R112.1 117.98,20.29 130.05,20.29 131.83,18.51 C109.+ | C108.+ 146.62,7.65 154.31,16.1 154.24,16.1 154.24,17.16 153.23,18.18 151,18.13 150.88,18 Q104.D
  Bottom 1.016: X3.1 161.29,27.34 148.91,27.34 146.37,29.88 C109B.1 144.78,28.61 134.3,18.13 C109.+ Q104.D
N$37
  Bottom 0.508: C208.- 151.77,64.48 157.16,59.09 157.16,44.16 156.84,43.85 | C208B.2 114.93,47.72 117.47,50.26 R212.2 117.6,50.64 127.89,50.64 131.32,54.07 C209.-
  Bottom 1.016: X3.3 159.38,41.31 156.84,43.85 146.05,43.85 C209B.2 143.51,42.58 C209.- 150.18,54.32 Q204.D
N$38
  Top 0.305: Q7.C 191.66,53.16 191.66,50.78 Q7.B 191.5,50.62 189.59,48.72 189.59,47.45 191.5,45.54 Q3.C
  Bottom 0.305: Q11.B 191.66,58.4 193.56,56.5 193.56,55.23 191.66,53.32 Q7.C
N$39
  Top 0.305: Q1.E 209.44,39.99 209.44,36.97 J1.3
N$40
  Bottom 0.305: J2.3 209.44,30.3 209.44,29.51 208.32,28.4 208.32,25.7 209.28,24.75 Q2.E
N$41
  Top 0.305: Q5.B 209.44,50.46 209.44,48.08 Q5.C 209.44,47.92 209.44,45.22 Q1.C
  Bottom 0.305: Q9.B 209.44,58.4 211.34,56.5 211.34,52.53 209.44,50.62 Q5.B
N$42
  Bottom 0.508: Q102.C 99.44,17.24 100.97,17.24 102.24,18.51 106.81,18.51 107.44,17.87 R111.1 107.57,17.75 107.57,15.33 R108.2
N$43
  Bottom 0.508: Q202.C 98.3,59.4 94.11,64.1 92.58,64.1 90.55,62.07 90.55,58.39 96.9,52.04 105.98,52.04 107.25,52.98 R211.1 R208.1
N$44
  Bottom 0.508: R110.2 107.57,12.67 104.01,12.67 103.5,12.16 Q103.C
N$45
  Bottom 0.508: Q102.E 99.44,12.03 101.47,14.06 101.47,15.33 103.25,17.11 103.5,17.11 Q103.E | 100.33,12.67 Q102.E | Q102.E 100.46,12.54 102.74,10.25 107.57,10.25 R109.1
N$46
  Bottom 0.508: 98.81,54.32 Q202.E 98.93,54.45 100.84,56.36 100.84,57.5 102.74,59.4 Q203.E 104.14,60.67 R209.2
N$47
  Bottom 0.508: R210.1 106.81,58.13 103,54.32 Q203.C
N$48
  Bottom 0.508: Q101.2 127.25,6.95 124.84,6.95 Q101.3 124.59,6.95 122.3,6.95 R106.2 122.05,7.08 121.54,7.59 118.75,7.59 | 118.75,7.59 117.86,7.59 R107.1 | V101.C 113.54,2.25 118.75,7.46 118.75,7.59
N$49
  Top 0.508: Q104.G 147.96,20.67 147,21.62 125.41,21.62 121.6,17.81 R111.2
N$50
  Bottom 0.508: 149.99,57.12 150.5,56.61 Q204.G 149.86,57.12 130.56,57.12 126.49,53.05 R211.2
N$51
  Top 0.508: C108B.2 110.11,22.83 108.33,22.83 106.17,20.67 106.17,17.24 104.78,15.84 104.65,15.84 103.5,14.7 Q103.B 104.14,14 112.71,14 115.25,11.46 133.99,11.46 137.8,7.65 C108.-
  Bottom 0.508: R114.S 112.4,25.11 C108B.2
N$52
  Top 0.508: C208.+ 136.4,64.48 133.48,67.4 127.89,67.4 127,66.52 127,65.63 120.78,59.4 105.54,59.4 103,56.86 | C208B.1 109.85,52.29 107.82,54.32 105.54,54.32 103,56.86 | Q203.B 103,56.86
  Bottom 0.508: R214.S 112.4,43.66 109.85,46.2 C208B.1
N$53
  Top 0.508: R114.A 109.85,24.99 111.51,23.34 111.51,22.45 109.47,20.41 107.7,20.41 R112.2
N$54
  Bottom 0.508: R113.1 117.47,29.56 R114.E
N$55
  Top 0.508: R214.E 108.59,43.53 107.31,44.8 R212.1
N$56
  Bottom 0.508: R214.A 114.93,41.62 R213.2
N$57
  Bottom 0.508: R102.1 C102.1
N$58
  Bottom 0.508: R103.2 C103.2
N$59
  Bottom 0.508: R104.2 C104.2
N$60
  Bottom 0.508: C201.1 81.53,66.01 79.12,66.01 R201.1
N$61
  Bottom 0.508: C202.1 81.53,59.66 79.12,59.66 R202.1
N$62
  Bottom 0.508: C203.2 81.53,62.83 79.12,62.83 R203.2
N$63
  Bottom 0.508: C204.2 81.53,56.48 79.12,56.48 R204.2
N$64
  Bottom 0.508: R101.1 C101.1
N$65
  Top 1.016: U$5.P3 33.27,42.89 56.2,42.89 63.82,35.27 R4.2
  Bottom 1.016: U$5.P3 20.31,32.41 10.16,22.26 X2.2
N$66
  Bottom 1.016: X2.3 21.55,17.18 U$5.P1
N$67
  Bottom 1.016: X2.1 6.03,27.97 F1.1
N$68
  Bottom 1.016: U$5.P5 13.31,46.41 F1.2
OUT+
  Top 0.305: X1.1 191.5,66.18 191.5,61.1 Q11.C | RFB1.2 204.04,58.72 206.58,58.72 209.28,56.02 Q9.C 209.28,55.86 205.94,52.53 205.94,43.16 ROUT+.2
  Bottom 0.305: Q11.C 191.66,60.94 201.97,60.94 204.04,58.88 RFB1.2
OUT-
  Top 0.305: Q10.C 209.28,4.11 207.37,6.01 204.67,6.01 RFB2.1 204.51,6.17 203.56,7.12 201.34,7.12 200.23,6.01 199.28,6.01 ROUT-.2
  Bottom 0.305: Q12.C 191.66,9.35 195.78,9.35 199.12,6.01 ROUT-.2 | X1.5 208.17,59.67 210.55,59.67 219.44,50.78 219.44,15.54 216.1,12.2 216.1,10.78 209.44,4.11 Q10.C
SHIELD  (via drill 1)
  other vias: 174.26,28.36
  pour Top (isolate 0.406): 220.29,71.1 220.29,0.23 170.7,0.23 170.7,71.1
  pour Bottom (isolate 0.406): 220.29,71.1 220.29,0.23 170.7,0.23 170.7,71.1

## Text on the board
tValues: O+ | 0V | O- | I+ | I- | V- | +24V | -24V | Shield | V+ | UGS PREAMP Gael v1
Measures: Ph | Terre | Ntr